# Altium PCB SDL_led_frontend.PcbDoc
Units mil, origin at the board's own origin, x right, y up, seen from the top; angles counter-clockwise.
Board outline 2200 x 2200 mil, 2 copper layers (Top Layer, Bottom Layer); 20 components, 12 nets, 67 pads, 115 vias.
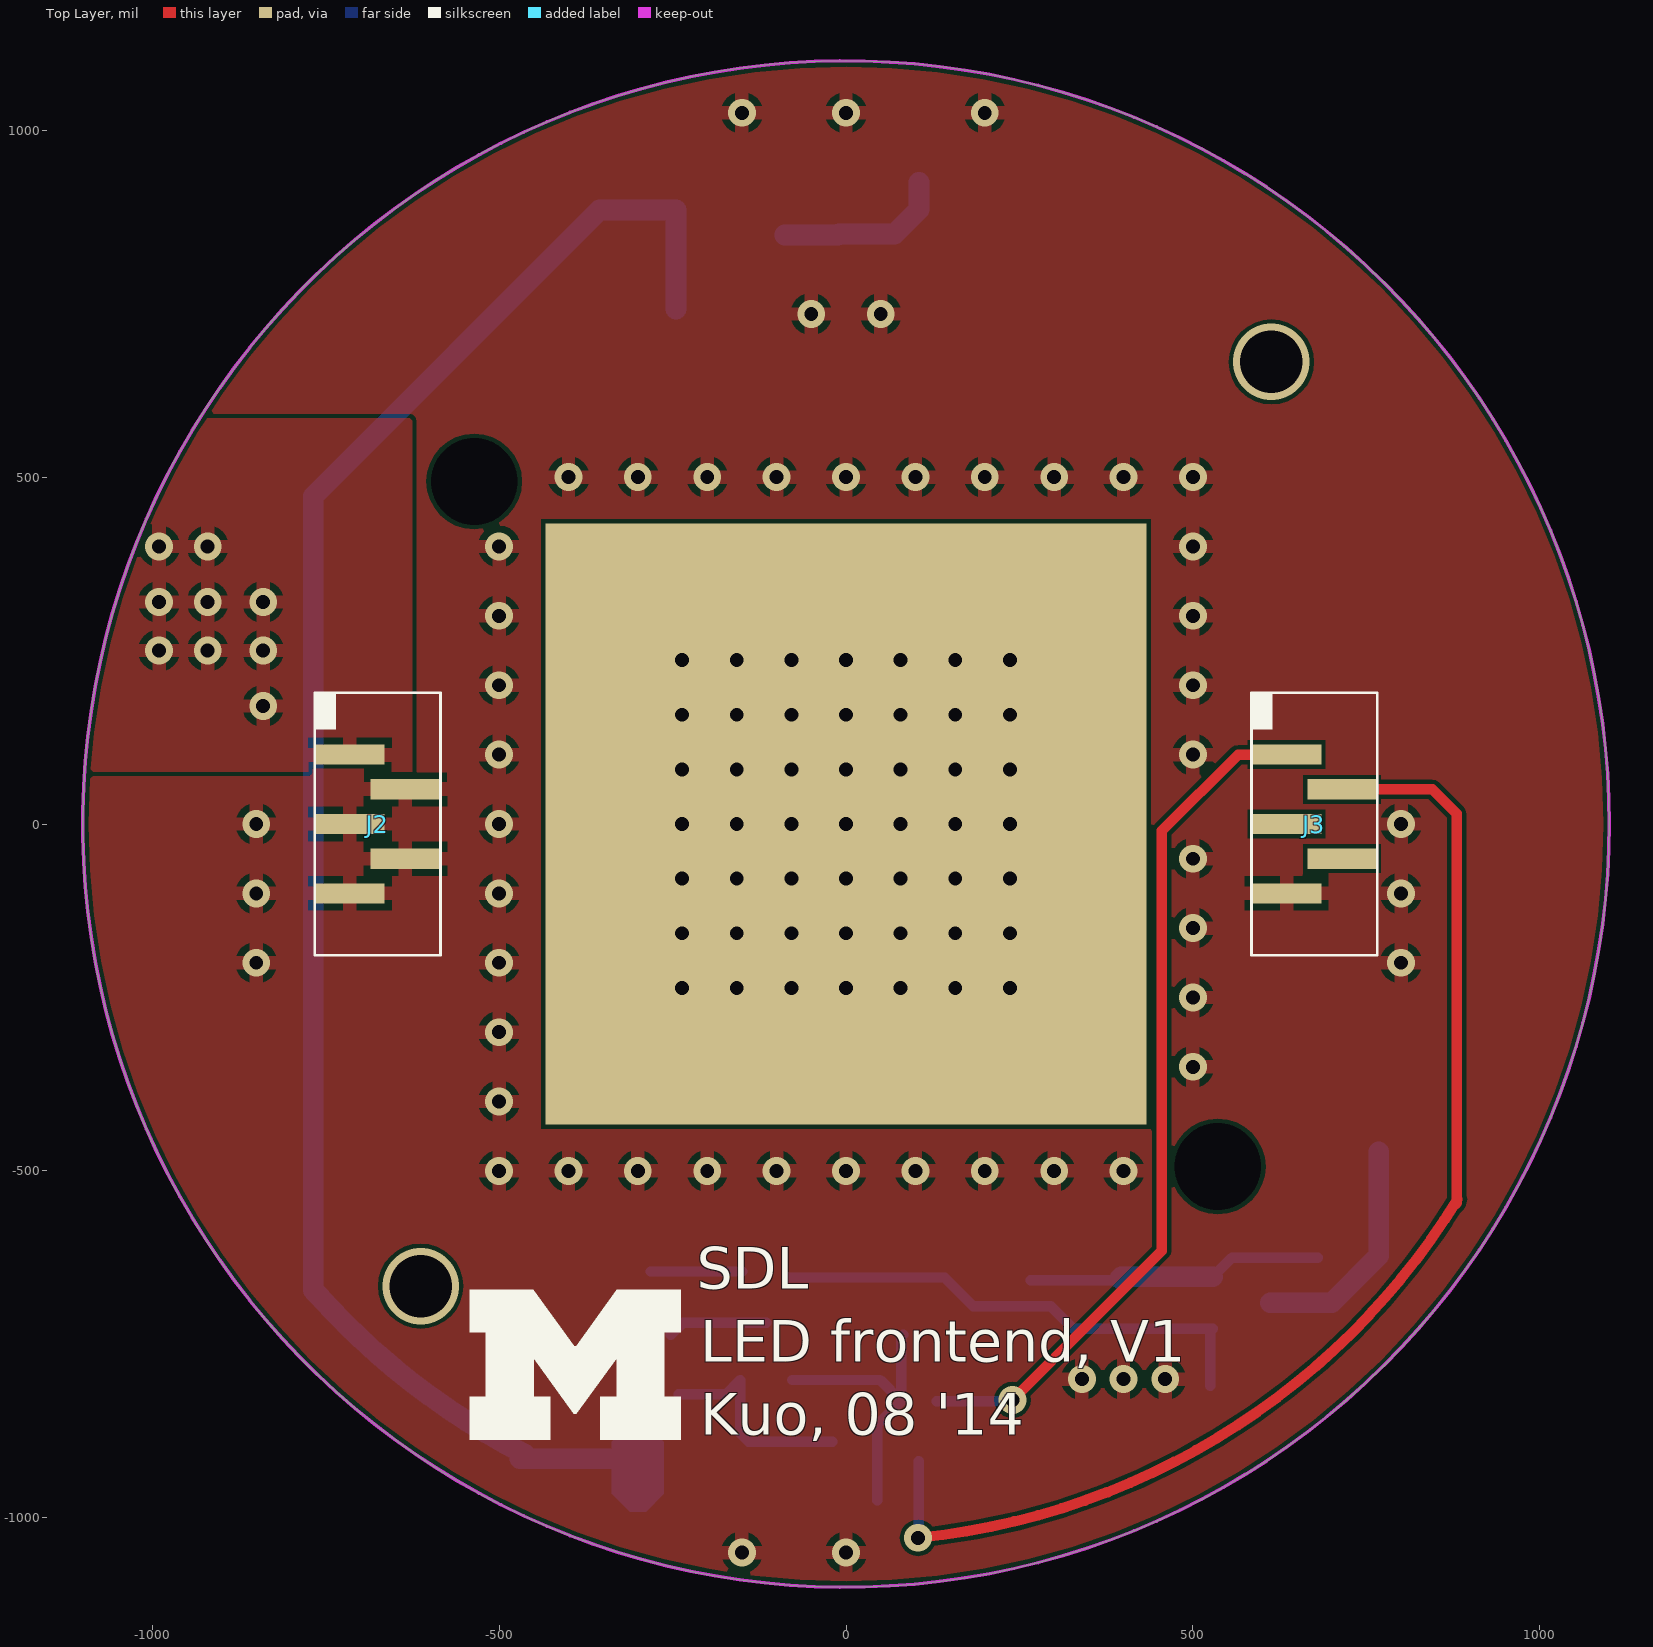
[diagram p0: Top Layer view]
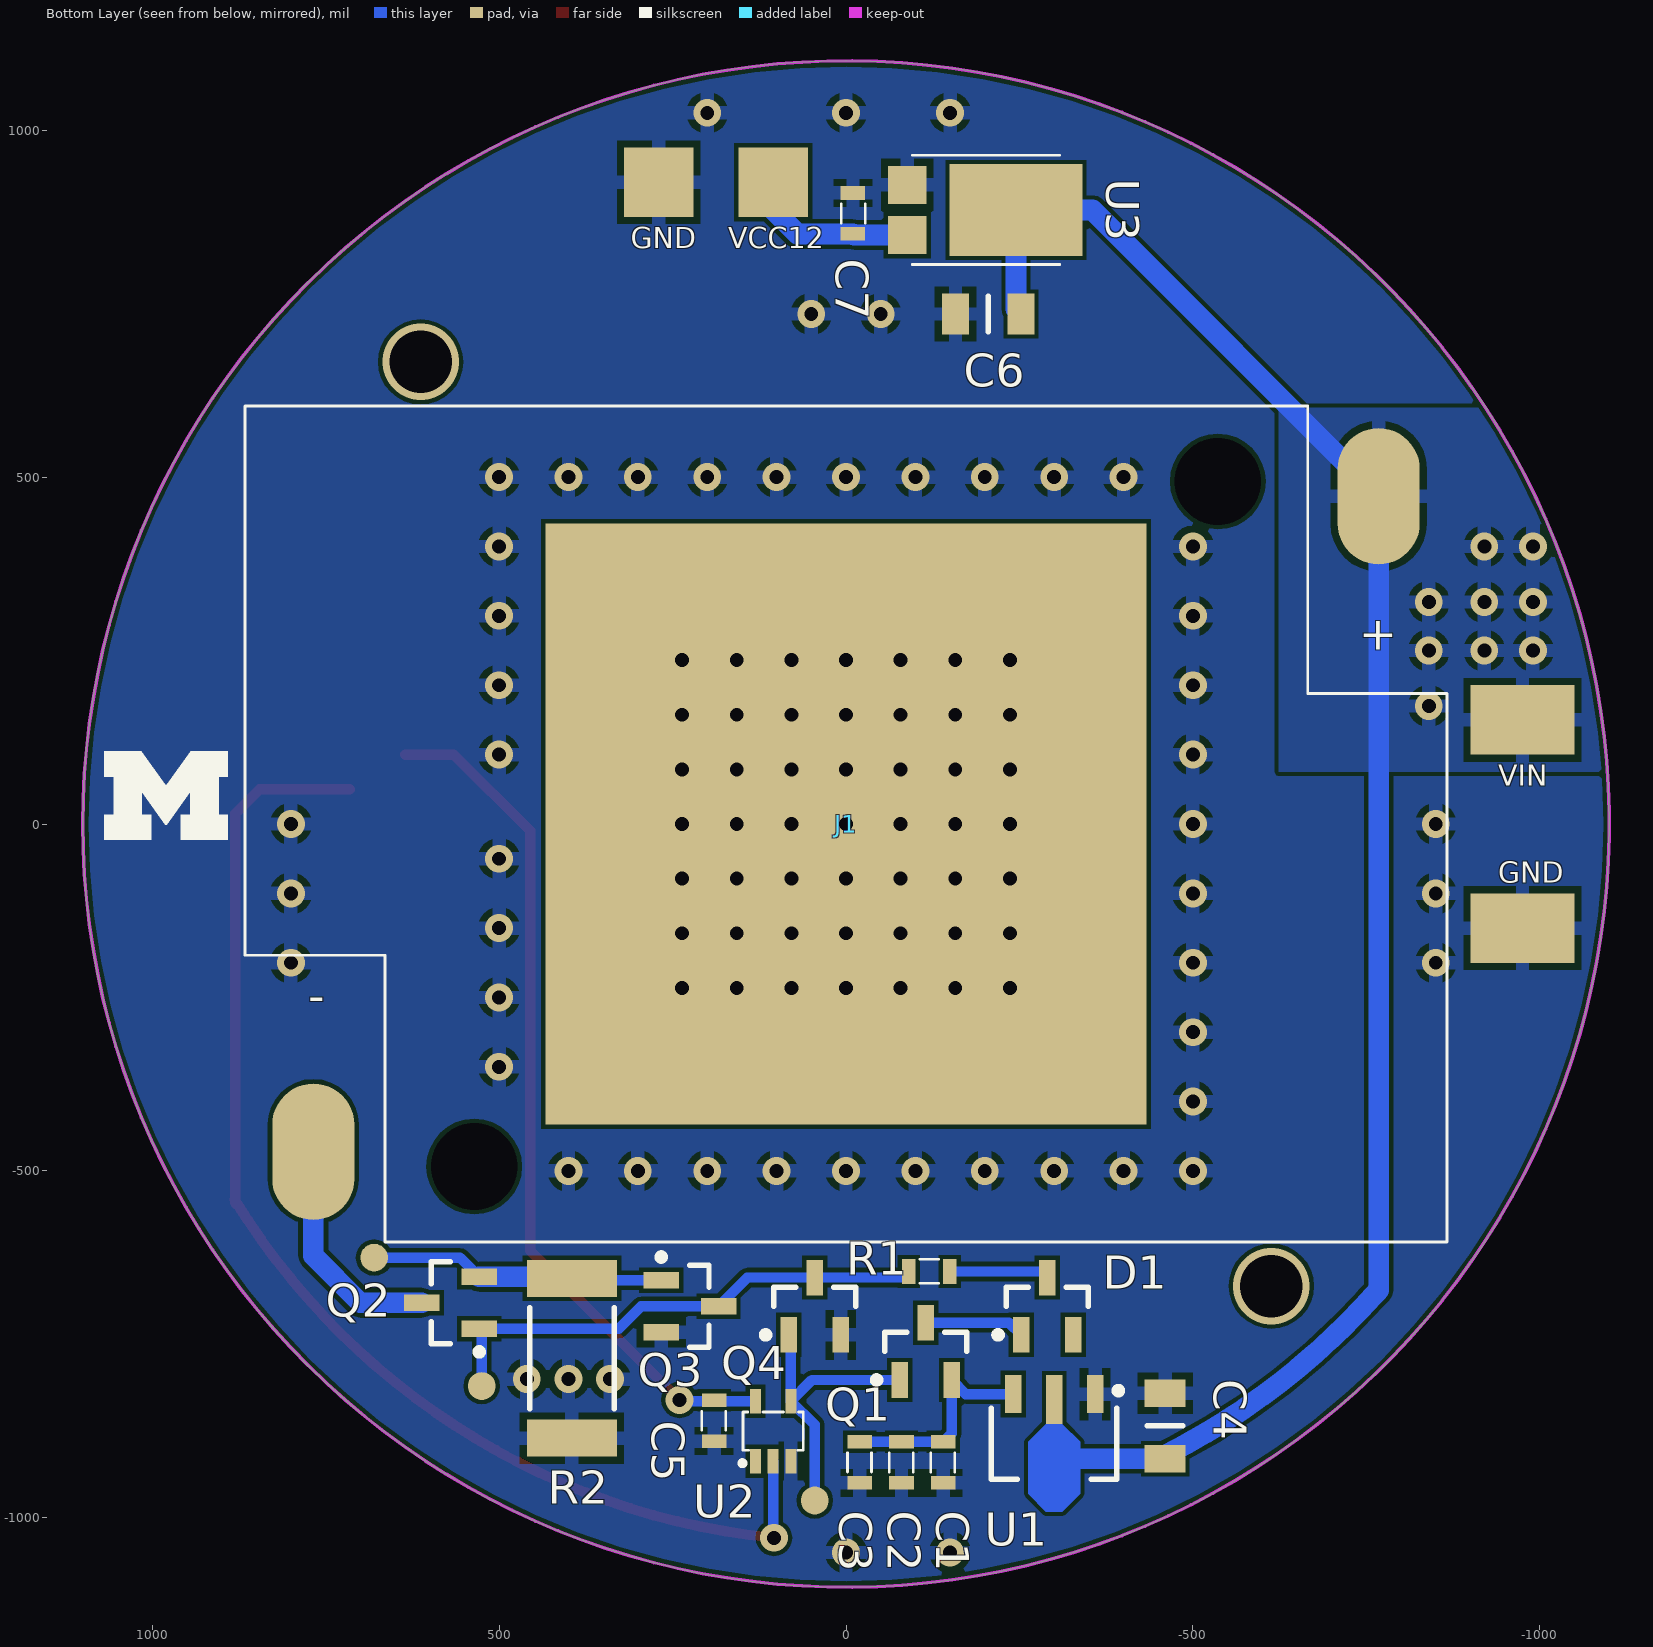
[diagram p1: Bottom Layer view, seen from below]

## Layer stack, top to bottom
Top Solder: solder mask 0.4, Solder Resist, Dk 3.5
Top Layer: signal copper 1.4
Dielectric 1: dielectric 12.6, FR-4, Dk 4.8
Bottom Layer: signal copper 1.4
Bottom Solder: solder mask 0.4, Solder Resist, Dk 3.5

## Board outline
-1100,0 ccw(c0,0) 0,-1100 ccw(c0,0) 1100,0 ccw(c0,0) 0,1100 ccw(c0,0)

## Design rules (kind name [scope] priority, off if disabled: settings)
Clearance "Clearance~Sunstone Circuits" [All] p1: gap=6 // Sunstone Circuits Minimum Clearance Rule (Double Sided)
HoleSize "HoleSize~Sunstone Circuits" [All] p1: absolutevalues=TRUE maxlimit=251 minlimit=16 maxpercent=80.000 minpercent=20.000 // SSC Hole Size Rule For Single Sided & Double Sided Designs.
HoleSize Testpoint [All] p2: absolutevalues=TRUE maxlimit=100 minlimit=1 maxpercent=80.000 minpercent=20.000
HoleSize TestPointUsage [All] p3: absolutevalues=TRUE maxlimit=100 minlimit=1 maxpercent=80.000 minpercent=20.000
MinimumAnnularRing "MinimumAnnularRing~Sunstone Circuits" [All] p1: minimumring=7 // Sunstone Circuits Minimum Annular Ring (Double Sided)
PlaneClearance "PlaneClearance~Sunstone Circuits" [All] p1: clearance=12 // Sunstone Circuits Power Plane Clearance Rule (Double Sided)
PlaneConnect "PlaneConnect~Sunstone Circuits" [All] p1: planeconnectstyle=Relief reliefexpansion=10 reliefentries=4 reliefconductorwidth=8 reliefairgap=10 // Sunstone Circuits Power Plane Connect Rule (Double Sided)
PolygonConnect "PolygonConnect~Sunstone Circuits" [All] p1: connectstyle=Relief reliefconductorwidth=20 reliefentries=4 polygonreliefangle="90 Angle" airgapwidth=10 // Sunstone Circuits Polygon Connect Style (Double Sided)
RoomDefinition led_frontend [InComponentClass('led_frontend')] p1 off: confinementstyle=ConfineIn formatcopy=TRUE lockcomponents=FALSE outline -878.11,-614.33 -878.11,614.33 -353.67,614.33 -353.67,975.71 -47.67,975.71 -47.67,936.26 24.61,936.26 24.61,614.33 878.11,614.33 878.11,-614.33 658.74,-614.33 658.74,-780.71 480.79,-780.71 480.79,-932.56 166.49,-932.56 166.49,-951.93 14.61,-951.93 14.61,-976.26 -188.62,-976.26 -188.62,-1011.81 -412.36,-1011.81 -412.36,-966.14 -521.18,-966.14 -521.18,-614.33
RoutingVias "RoutingVias~Sunstone Circuits" [All] p1: holewidth=16 width=30 viastyle="Through Hole" minholewidth=16 minwidth=30 maxholewidth=20 maxwidth=40 // Sunstone Circuits Routing Vias Rule (Double Sided)
ShortCircuit "ShortCircuit~Sunstone Circuits" [All] p1: allowed=FALSE // Sunstone Circuits Short Circuit Rule~Do Not Allow (Double Sided)
SolderMaskExpansion "Tent Vias" [isvia] p1: expansion=-20 // Sunstone Circuits Solder Mask Expansion Rule (Double Sided)
SolderMaskExpansion "SolderMaskExpansion~Sunstone Circuits" [All] p2: expansion=3 // Sunstone Circuits Solder Mask Expansion Rule (Double Sided)
ViasUnderSMD "ViasUnderSMD~Sunstone Circuits" [All] p1: allowed=FALSE // Sunstone Circuits Vias Under SMD~Do Not Allow (Double Sided)
Width "Width~Sunstone Circuits" [All] p1: maxlimit=100 minlimit=6 preferedwidth=10 // Sunstone Circuits Minimum Width Rule (Double Sided)
25 further rules are at their usual default settings.

## Components (designator, comment, footprint, x,y, rotation, side; value= is the part's Value field where it differs from the comment)
C1 "Ceramic capacitor" 0603 -140,-920 r270 bottom
C2 "Ceramic capacitor" 0603 -80,-920 r270 bottom
C3 "Ceramic capacitor" 0603 -20,-920 r270 bottom
C4 "Ceramic capacitor" 0805 -460,-867.56 r90 bottom
C5 "Ceramic capacitor" 0603 190,-860 r270 bottom
C6 "Ceramic capacitor" 0805 -205,735 r0 bottom
C7 "Ceramic capacitor" 0603 -10,880 r90 bottom
D1 "BAS40" SOT23-3 -290,-695 r90 bottom
J1 "1807200002" MOLEX 0,0 r0 bottom
J2 "Samtec connector" TFM-105-02-L-S -675,0 r90 top
J3 "Samtec connector" TFM-105-02-L-S 675,0 r90 top
Q1 "Si2309CDS" SOT23-3 -115,-760 r90 bottom
Q2 "Si2308BDS" SOT23-3 570,-690 r0 bottom
Q3 "Si2308BDS" SOT23-3 225,-695 r180 bottom
Q4 "Si2308BDS" SOT23-3 45,-695 r90 bottom
R1 "Chip resistor" 0603 -120,-645 r0 bottom
R2 "Chip resistor" 2512 395,-770 r270 bottom
U1 "ZXTR2005Z" SOT89 -300,-892.56 r270 bottom
U2 "SN74AUP1T14" "SC-70-5 (DCK)" 105,-875 r180 bottom
U3 "ZXTR2012P5" PowerDI-5 -245,885 r270 bottom

## Footprints (in the part's own frame and the unit in brackets; to place one, negate y for a bottom-side part, rotate by r counter-clockwise, add the part's x,y. Pads: shape width x height; smd on the part's side, far side on the other; paste and mask are expansions set on the pad)
0603 [mm] "2-Leads, Body 1.55x0.85mm, IPC Medium Density"
  rect 0.5x0.9 smd: 1(-0.75,0) 2(0.75,0)
  silkscreen extent -0.35,-0.45 0.35,0.43, body extent -0.75,-0.42 0.75,0.43, height 0.5
0805 [mm] "Chip Resistor, Body 2.0x1.2mm, IPC Low Density"
  rect 1x1.5 smd: 1(-1.2,0) 2(1.2,0)
  silkscreen extent 0,-0.65 0,0.65, body extent -1.07,-0.7 1.07,0.7, height 0.7
2512 [mm] "Chip Capacitor, 2-Leads, Body 6.30x3.10mm, IPC Medium Density"
  rect 1.35x3.3 smd: 1(-2.925,0) 2(2.925,0)
  silkscreen extent -1.85,-1.55 1.85,1.55, body extent -3.25,-1.65 3.25,1.65, height 0.8
MOLEX [mm] "CREE LED holder"
  oval 1.7x2.8 hole 3.175: 0(-13.61,-12.54) 0(13.61,12.54)
  rect 22x22 smd far side: 3(0,0)
  rect 22x22 smd: 3(0,0)
  oval 3x5 smd: +(-19.5,-12) -(19.5,12)
  silkscreen extent -22,-15.3 22,15.3, body extent -22,-15.3 22,15.3, height 4.5
PowerDI-5 [mm] "PowerDI-5 from diode inc"
  rect 1.39x1.4 smd: 1(-0.92,-3.982) 2(0.92,-3.982)
  rect 3.36x4.86 smd: 3(0,0)
  silkscreen extent -2,-3.8 2,1.6, body extent -2,-3.8 2,1.6, height 1.1
"SC-70-5 (DCK)" [mm]
  rect 0.4x0.9 smd mask+0.05: 1(-0.65,-1.1) 2(0,-1.1) 3(0.65,-1.1) 4(0.65,1.1) 5(-0.65,1.1)
  silkscreen extent -1.18,-1.23 1.1,0.7, body extent -1.1,-0.7 1.1,0.7, height 1.1
SOT23-3 [mm] "SOT23, 3-Leads, Body 2.9x1.3mm, Pitch 0.95mm, Lead Span 2.3mm, IPC Medium Density"
  rect 1.3x0.6 smd: 1(-1.05,0.95) 2(-1.05,-0.95) 3(1.05,0)
  silkscreen extent -1.17,-1.5 0.7,1.93, body extent -0.7,-1.5 0.7,1.5, height 1.2
SOT89 [mm] "SOT89, 3-Leads, Body 4.50x2.45mm, Pitch 1.50mm, Lead Span 4.1mm, IPC Medium Density"
  rect 1.4x0.6 smd: 1(-1.8,1.5) 3(-1.8,-1.5)
  rect 1.8x0.6 smd: 2(-1.6,0)
  Top Layer region: -0.7,0.3 -0.05,0.95 1.85,0.95 2.5,0.3 2.5,-0.3 1.85,-0.95 -0.05,-0.95 -0.7,-0.3
  silkscreen extent -2.05,-2.3 1.32,2.47, body extent -1.28,-2.3 1.32,2.3, height 1.6
TFM-105-02-L-S [mm] "Samtec TFM, single row, 5 pos"
  rect 0.74x2.54 smd: 1(2.54,1.015) 2(1.27,-1.015) 3(0,1.015) 4(-1.27,-1.015) 5(-2.54,1.015)
  silkscreen extent -4.8,-2.3 4.83,2.33, body extent -4.8,-2.3 4.8,2.3, height 5.59

## Part data
C1 C2 C7: library part C_10u_16V_0603_ceramic, "Ceramic capacitor, 10 uF, 16 V, 0603 package"
C3 C5: library part C_0.1u_0603_ceramic, "Ceramic capacitor, 0.1 uF, 0603 package"
C4 C6: library part C_1u_100V_0805_ceramic, "Ceramic capacitor, 1 uF, 100 V, 0805 package"
D1: "SURFACE MOUNT SCHOTTKY BARRIER DIODE"
J1: library part "Molex LED holder", "LED Array Holders  for CREE* XLamp?  Arrays"
J2 J3: library part "Samtec conntector", "Samtec connector, 1.27 mm, single row, 5 pos SMD"
Q1: "P-Channel 60-V (D-S) MOSFET"
Q2 Q3 Q4: "N-Channel 60-V (D-S) MOSFET"
R1: library part R_100_0603, "Chip resistor, 100,  0603 package"
R2: library part R_4.99_2512, "Chip resistor, 4.99, 2512 package"
U1: "100V INPUT, 5V 30mA REGULATOR TRANSISTOR"
U2: "LOW POWER, 1.8/2.5/3.3-V INPUT, 3.3-V CMOS OUTPUT, SINGLE  SCHMITT-TRIGGER INVERTER GATE"
U3: "100V INPUT, 12V 40mA REGULATOR TRANSISTOR"

## Free pads (board coordinates)
  rect 150x100 smd far side: ""(-975,-150) ""(-975,150)
  round 40 smd far side: ""(45,-975) ""(525,-810) ""(680,-625)
  rect 100x100 smd far side: ""(105,925) ""(270,925)

## Via types
v1: diameter 40, hole 20, Top Layer to Bottom Layer, 113 vias
v2: diameter 110, hole 90, Top Layer to Bottom Layer, 2 vias

## Nets (pads, with @x,y where several pads share a name; then routed paths per layer and width w, separated by ;. In a path a pad name is that pad's centre, name@x,y a point inside that pad or via, vN(x,y) a via of type N, cw(c..) or ccw(c..) an arc to the next point about the centre after c; other vN are vias at no path point)
GND: C1.2 C2.2 C3.2 C4.2 C5.2 C6.2 C7.2 J2.2 J2.3 J2.4 J2.5 J3.5 pad.@270,925 pad.@-975,-150 Q3.2 Q4.2 R2.2 U1.1 U2.3 U3.1
  other v1: -150,-1050 0,-1050 340,-800 400,-800 460,-800 -500,-500 -400,-500 -300,-500 -200,-500 -100,-500 0,-500 100,-500 200,-500 300,-500 400,-500 -500,-400 500,-350 -500,-300 500,-250 -850,-200 -500,-200 800,-200 500,-150 -850,-100 -500,-100 800,-100 500,-50 -850,0 -500,0 800,0 -500,100 500,100 -500,200 500,200 -500,300 500,300 -500,400 500,400 -400,500 -300,500 -200,500 -100,500 0,500 100,500 200,500 300,500 400,500 500,500 -50,735 50,735 -150,1025 0,1025 200,1025
LED_DRIVE: J3.2 U2.2 | length 1828.3
  Top Layer w15: v1(103.92,-1028.83) ccw(c0,0) 881.36,-540.84 ; J3.2 845,50 880,15 880,-546.24 874.71,-551.52 cw(c0,0) 864.96,-566.7
  Bottom Layer w15: v1(103.92,-1028.83) 105,-1027.76 U2.2
NetC1_1: C1.1 C2.1 C3.1 Q1.2 U1.3 | length 311.2
  Bottom Layer w15: U1.3 -172.76,-821.69 Q1.2 -152.4,-878.07 C1.1 C2.1 C3.1
NetD1_1: D1.1 Q1.3 | length 144.9
  Bottom Layer w15: D1.1 -234.92,-718.66 Q1.3
NetD1_3: D1.3 R1.1 | length 131.8
  Bottom Layer w15: D1.3@-281.34,-645 R1.1
NetJ1_-: J1.- Q2.3 | length 334.3
  Bottom Layer w30: Q2.3 700,-690 767.72,-622.28 J1.-
NetQ1_1: pad.@45,-975 Q1.1 Q4.1 U2.4 | length 423.7
  Bottom Layer w15: Q1.1 49.06,-801.34 U2.4 ; pad.@45,-975 45,-866.1 U2.4 ; Q4.1 79.41,-739.33 U2.4
NetQ2_1: pad.@525,-810 Q2.1 Q3.3 Q4.3 R1.2 | length 725.1
  Bottom Layer w15: R1.2@-81.81,-653.66 Q4.3 142.32,-653.66 Q3.3 295,-695 327.4,-727.4 Q2.1 525,-731.06 pad.@525,-810
NetQ2_2: pad.@680,-625 Q2.2 Q3.1 R2.1 | length 427.2
  Bottom Layer w15: Q3.1 392.24,-657.6 R2.1 ; Q2.2 556.26,-625 pad.@680,-625
  Bottom Layer w30: R2.1 397.24,-652.6 Q2.2
VCC3.3: C5.1 J3.1 U2.5 | length 1244.8
  Top Layer w15: v1(240,-830) 455,-615 455,-10 565,100 J3.1
  Bottom Layer w15: U2.5 238.31,-831.69 v1(240,-830)
VCC12: C7.1 pad.@105,925 U3.2 | length 245.6
  Bottom Layer w30: U3.2 C7.1@-11.69,848.78 ; C7.1 70,850.47 105,885.47 pad.@105,925
VIN: C4.1 C6.1 J1.+ J2.1 pad.@-975,150 U1.2 U3.3 | length 2575.1
  Bottom Layer w30: -767.08,-671.53 ccw(c0,0) C4.1@-462.84,-908.37 ; -745.61,-695.29 cw(c0,0) -757.63,-682.17 -767.72,-672.09 J1.+ -355.16,885 U3.3 C6.1@-245,742.24 ; C4.1@-470.2,-914.8 C4.1 -309.8,-914.8 -300,-905
  other v1: -840,170 -990,250 -920,250 -840,250 -990,320 -920,320 -840,320 -990,400 -920,400
pads on no net: D1.2 J1.0 J1.3 J3.3 J3.4 U2.1
copper on no net:
  other v1: -236.22,-236.22 -157.48,-236.22 -78.74,-236.22 0,-236.22 78.74,-236.22 157.48,-236.22 236.22,-236.22 -236.22,-157.48 -157.48,-157.48 -78.74,-157.48 0,-157.48 78.74,-157.48 157.48,-157.48 236.22,-157.48 -236.22,-78.74 -157.48,-78.74 -78.74,-78.74 0,-78.74 78.74,-78.74 157.48,-78.74 236.22,-78.74 -236.22,0 -157.48,0 -78.74,0 0,0 78.74,0 157.48,0 236.22,0 -236.22,78.74 -157.48,78.74 -78.74,78.74 0,78.74 78.74,78.74 157.48,78.74 236.22,78.74 -236.22,157.48 -157.48,157.48 -78.74,157.48 0,157.48 78.74,157.48 157.48,157.48 236.22,157.48 -236.22,236.22 -157.48,236.22 -78.74,236.22 0,236.22 78.74,236.22 157.48,236.22 236.22,236.22
  other v2: -613,-666 613,666

## Polygon pours and split planes (outlines as drawn)
VIN on Top Layer "Bottom Layer-No Net" (solid, pour order 8): -625,75 -1100,75 -1079.58,212.65 -1067.27,274.56 -1042.18,357.27 -992.09,478.19 -935,585 -625,585
GND on Top Layer "Bottom Layer-No Net" (solid, pour order 6): -1101.32,-4.11 ccw(c-1.32,-4.11) -1.32,-1104.11 ccw(c-1.32,-4.11) 1098.68,-4.11 ccw(c-1.32,-4.11) -1.32,1095.89 ccw(c-1.32,-4.11)
VIN on Bottom Layer "Bottom Layer-No Net" (solid, pour order 7): -624.03,75 -1099.03,75 -1091.57,150.74 -1066.31,277.72 -1044.07,351.03 -975.1,517.53 -920,600 -624.03,600
GND on Bottom Layer "Bottom Layer-No Net" (solid, pour order 5): -1100,0 ccw(c0,0) 0,-1100 ccw(c0,0) 1100,0 ccw(c0,0) 0,1100 ccw(c0,0)

## Keep-outs
Keep-Out Layer:
  circle w5: c0,0 r1100

## Silkscreen, mask and mechanical layers (free items; w line width, h text height)
Top Overlay:
  region: -542.04,-887.5 -426.5,-887.5 -426.5,-825.81 -450,-825.81 -450,-770 -392.72,-850.29 -388.8,-850.29 -330.55,-770 -330.55,-825.81 -354.05,-825.81 -354.05,-887.5 -238.51,-887.5 -238.51,-825.81 -262.01,-825.81 -262.01,-732.79 -238.51,-732.79 -238.51,-671.11 -330.06,-671.11 -388.8,-752.38 -391.74,-752.38 -450.49,-671.11 -542.04,-671.11 -542.04,-732.79 -519.52,-732.79 -519.52,-825.81 -542.04,-825.81
  text "SDL" at -215,-670 h60
  text "LED frontend, V1" at -210,-775 h60
  text "Kuo, 08 '14" at -210,-880 h60
Bottom Overlay:
  region: 890.87,-22.69 958.82,-22.69 958.82,13.59 945,13.59 945,46.41 978.69,-0.81 980.99,-0.81 1015.25,46.41 1015.25,13.59 1001.43,13.59 1001.43,-22.69 1069.38,-22.69 1069.38,13.59 1055.56,13.59 1055.56,68.29 1069.38,68.29 1069.38,104.57 1015.54,104.57 980.99,56.78 979.26,56.78 944.71,104.57 890.87,104.57 890.87,68.29 904.12,68.29 904.12,13.59 890.87,13.59
  text "VCC12" at 170,830 h30
  text "GND" at 310,830 h30
  text "VIN" at -940,55 h30
  text "GND" at -940,-85 h30

## Text inside footprints (layer, text, board x,y; h text height)
J1: Bottom Overlay "+" at -794.29,292.32 h48 r180; Bottom Overlay "-" at 750.98,-235.24 h48 r180